# EAGLE board MP3 Breakout-Panel (EAGLE 9.0.1), part 1 of 2
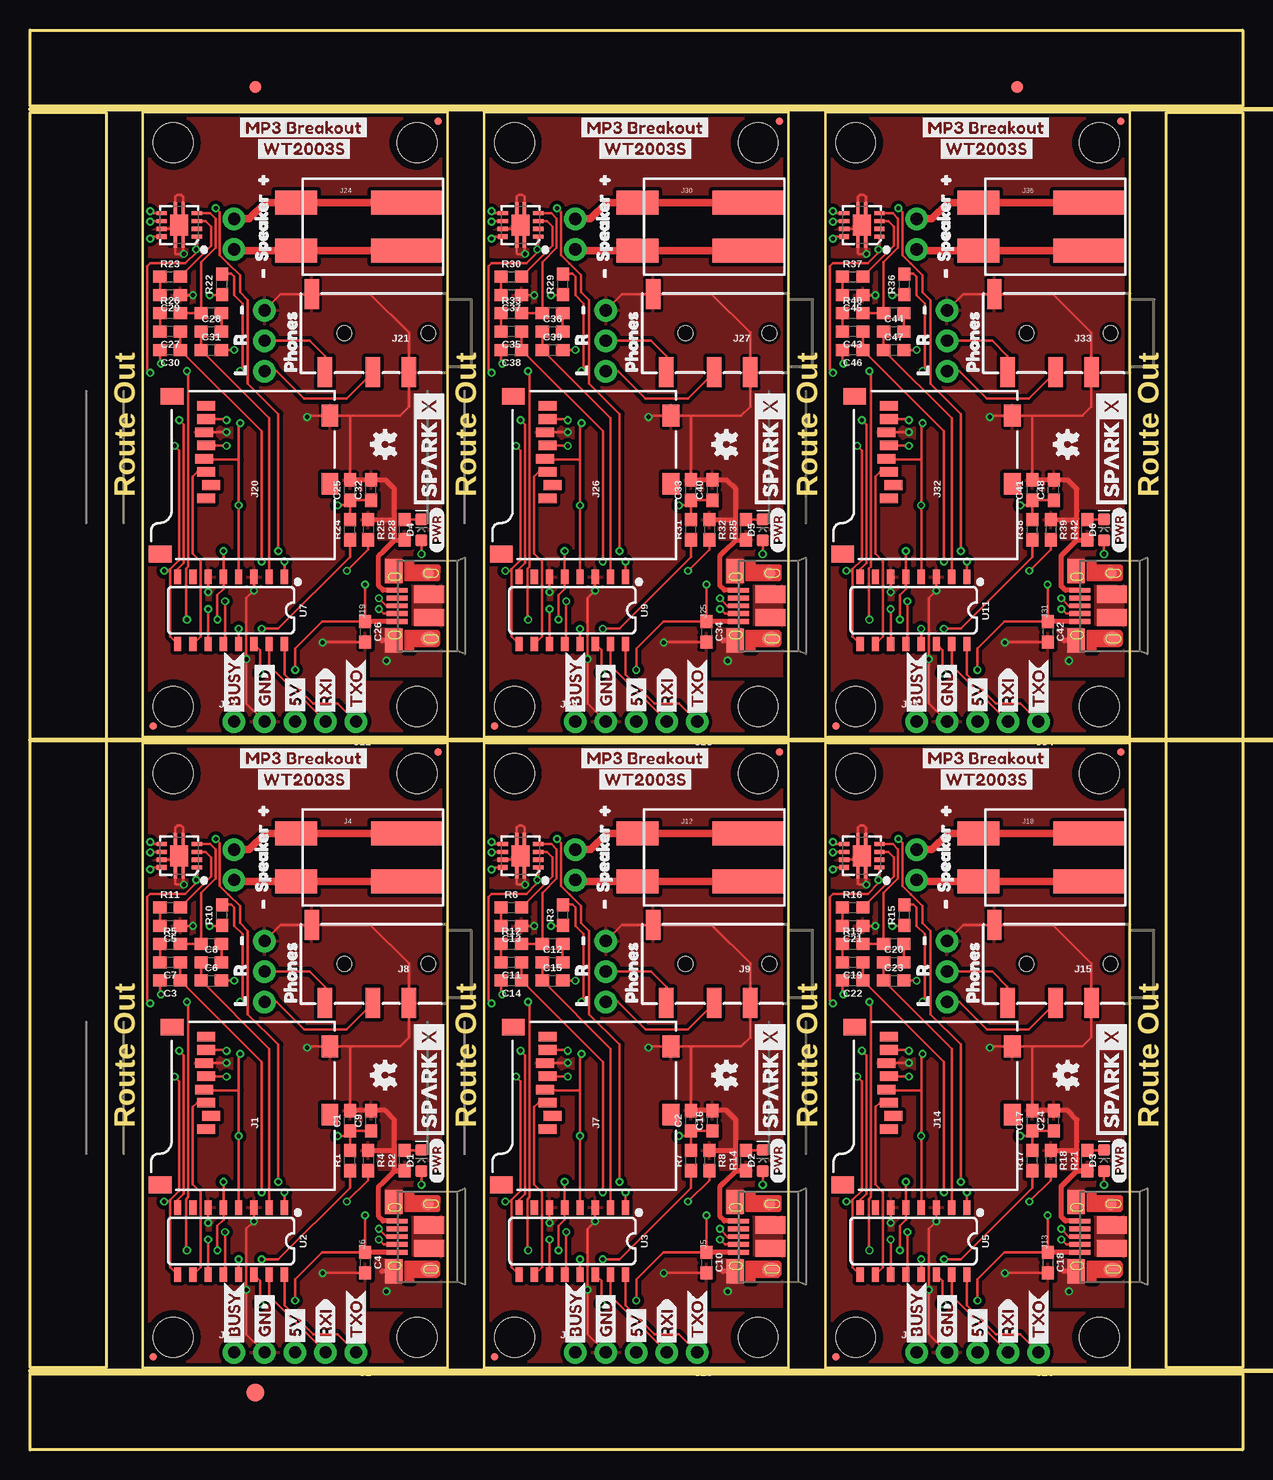
[diagram p0: board, top side]
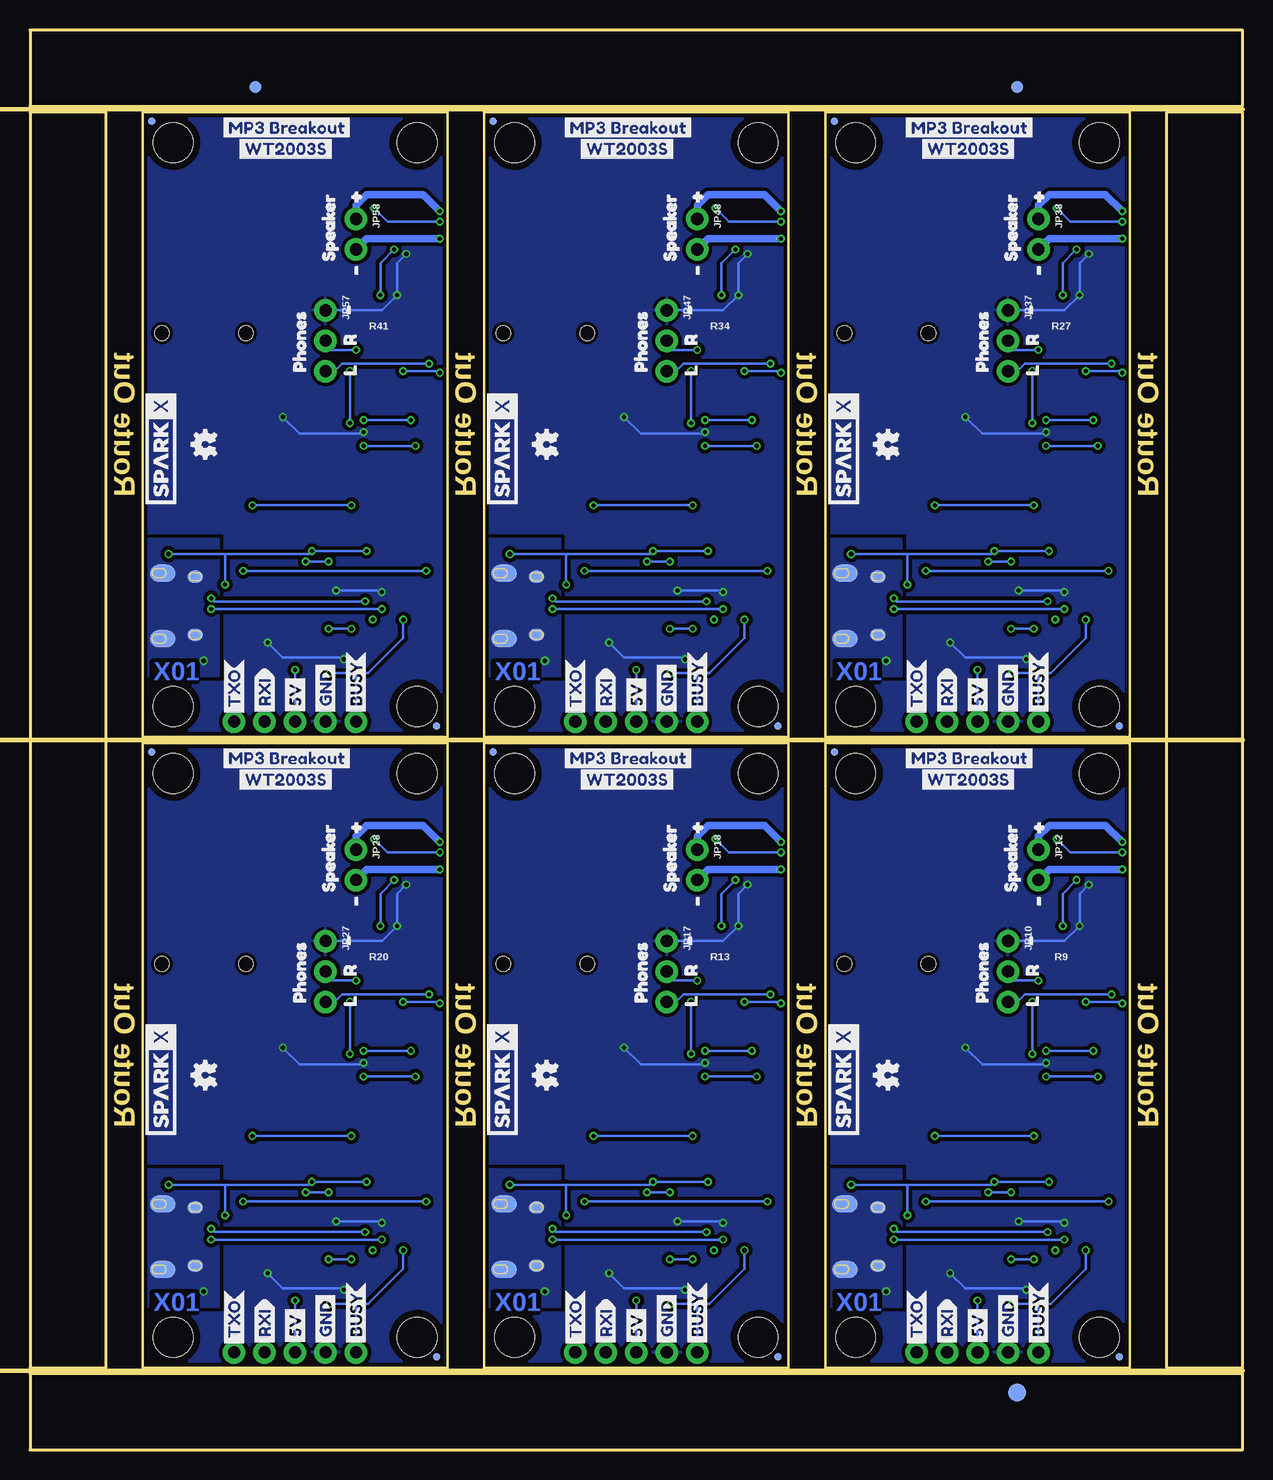
[diagram p1: board, bottom side, seen from below]

Size 101.09 x 118.36 mm. Coordinates in mm from the lower left corner, seen from the top.
Outline: 34.8,6.86 34.8,58.93 9.4,58.93 9.4,6.86 34.8,6.86
Outline: 63.25,6.86 63.25,58.93 37.85,58.93 37.85,6.86 63.25,6.86
Outline: 91.69,6.86 91.69,58.93 66.29,58.93 66.29,6.86 91.69,6.86
Outline: 34.8,59.44 34.8,111.51 9.4,111.51 9.4,59.44 34.8,59.44
Outline: 63.25,59.44 63.25,111.51 37.85,111.51 37.85,59.44 63.25,59.44
Outline: 91.69,59.44 91.69,111.51 66.29,111.51 66.29,59.44 91.69,59.44
Outline: 0,6.35 101.09,6.35 101.09,0 0,0 0,6.35
Outline: 94.74,111.51 101.09,111.51 101.09,6.86 94.74,6.86 94.74,111.51
Outline: 0,118.36 101.09,118.36 101.09,112.01 0,112.01 0,118.36
Outline: 0,111.51 6.35,111.51 6.35,6.86 0,6.86 0,111.51
Copper layers (1*16): Top 0.035mm / dielectric 1.5mm / Bottom 0.035mm
Design rules "SparkFun-2-layer-PCBWay-LIMIT": minimum track width 6mil, minimum drill 0.3mm, track to track 6mil, track to pad 6mil, pad to pad 6mil, via to via 6mil, smd to smd 6mil, copper to edge 6mil, drill to drill 6mil, minimum pad ring 6mil, minimum via ring 6mil, stop-mask expansion 4mil, vias tented up to drill 25mil, thermal gap 10mil
Milling: 3 lines

## Footprints (pad centres in the part's own frame; a part is rotated, then mirrored left to right if it is on the bottom)
0603 = smd 1.1 x 1: 1 -0.85,0; 2 0.85,0
LED-0603 = smd 1 x 1: A -0.877,0; C 0.877,0
FIDUCIAL-1X2 = smd 1 x 1: 1 0,0
FIDUCIAL-1.5X3 = smd 1.5 x 1.5: 1 0,0
MICRO-SD-SOCKET = smd 1.8 x 1.4: CD1 -2.05,0.4; CD2 -7.75,0.4 | smd 0.8 x 1.5: CS -7.84,10.3; DI -6.74,10.7; DO -2.34,10.7; GND -3.44,10.9; RSV1 -8.94,10.7; RSV2 -1.24,10.7; SCLK -4.54,10.7; VCC -5.64,10.9 | smd 1.4 x 1.9: GND1 -13.6,14.55; GND3 -0.45,13.55
1X04_NO_SILK = drill 1.016 pad 1.88: 1 0,0; 2 2.54,0; 3 5.08,0; 4 7.62,0
1X01_NO_SILK = drill 1.016 pad 1.88: 1 0,0
1X02_POKEHOME = smd 3.5 x 2: P1 5.25,2; P2 5.25,-2 | smd 6 x 2: P3 -4,2; P4 -4,-2
USB-MICROB-PTH-MILL = smd 0.4 x 1.75: D+ 0,0; D- -0.65,0; GND 1.3,0; ID 0.65,0; VBUS -1.3,0 | smd 2 x 1.46: SHIELD -2.9,0.275; SHIELD2 2.9,0.275 | smd 1.425 x 2.5: SHIELD3 -0.963,-2.675; SHIELD4 0.963,-2.675 | smd 1.4 x 2.1 bottom: SHIELD5 -2.731,-2.531; SHIELD7 2.729,-2.531 | smd 1 x 1: SHIELD6 2.7,-2.575 | smd 1.1 x 1.5: SHIELD8 -2.731,-2.731 | smd 1 x 1.3 bottom: SHIELD9 -2.43,0.195; SHIELD10 2.43,0.195
AUDIO_JACK_3.5MM_TRRS_SMD_RA = smd 1.2 x 2.5: EARTH 11.3,-3.25; RING1 6.2,3.25; RING2 3.2,3.25; TIP 10.2,3.25 | hole 1.2: 1.6,0; 8.6,0
MICRO-FIDUCIAL = smd 0.635 x 0.635: 1 0,0
STAND-OFF = hole 3.302: 0,0
1X03_NO_SILK = drill 1.016 pad 1.88: 1 0,0; 2 2.54,0; 3 5.08,0
1X02_NO_SILK = drill 1.016 pad 1.88: 1 0,0; 2 2.54,0
QFN-8_PAD = smd 0.35 x 0.85: 1 -0.975,-1.475; 2 -0.325,-1.475; 3 0.325,-1.475; 4 0.975,-1.475; 5 0.975,1.475; 6 0.325,1.475; 7 -0.325,1.475; 8 -0.975,1.475 | smd 1.75 x 1.5: 9 0,0 | smd 1.025 x 0.28: 10 -1.387,-0.325; 11 1.387,-0.325; 12 1.387,0.325; 13 -1.387,0.325
SO16 = smd 0.6 x 1.2: 1 -4.445,-2.8; 2 -3.175,-2.8; 3 -1.905,-2.8; 4 -0.635,-2.8; 5 0.635,-2.8; 6 1.905,-2.8; 7 3.175,-2.8; 8 4.445,-2.8; 9 4.445,2.8; 10 3.175,2.8; 11 1.905,2.8; 12 0.635,2.8; 13 -0.635,2.8; 14 -1.905,2.8; 15 -3.175,2.8; 16 -4.445,2.8

## Placement (x,y rotation side)
C1  10uF  [0603]  26.67,27.43 90 top
C2  10uF  [0603]  55.12,27.43 90 top
C3  0.22uF  [0603]  11.68,39.12 180 top
C4  1.0uF  [0603]  27.94,15.62 270 top
C5  1.0uF  [0603]  11.68,43.69 180 top
C6  0.22uF  [0603]  15.11,39.12 0 top
C7  0.1uF  [0603]  11.68,40.64 180 top
C8  0.1uF  [0603]  15.11,40.64 0 top
C9  1.0uF  [0603]  28.45,27.43 90 top
C10  1.0uF  [0603]  56.39,15.62 270 top
C11  0.1uF  [0603]  40.13,40.64 180 top
C12  0.1uF  [0603]  43.56,40.64 0 top
C13  1.0uF  [0603]  40.13,43.69 180 top
C14  0.22uF  [0603]  40.13,39.12 180 top
C15  0.22uF  [0603]  43.56,39.12 0 top
C16  1.0uF  [0603]  56.9,27.43 90 top
C17  10uF  [0603]  83.57,27.43 90 top
C18  1.0uF  [0603]  84.84,15.62 270 top
C19  0.1uF  [0603]  68.58,40.64 180 top
C20  0.1uF  [0603]  72.01,40.64 0 top
C21  1.0uF  [0603]  68.58,43.69 180 top
C22  0.22uF  [0603]  68.58,39.12 180 top
C23  0.22uF  [0603]  72.01,39.12 0 top
C24  1.0uF  [0603]  85.34,27.43 90 top
C25  10uF  [0603]  26.67,80.01 90 top
C26  1.0uF  [0603]  27.94,68.2 270 top
C27  0.1uF  [0603]  11.68,93.22 180 top
C28  0.1uF  [0603]  15.11,93.22 0 top
C29  1.0uF  [0603]  11.68,96.27 180 top
C30  0.22uF  [0603]  11.68,91.69 180 top
C31  0.22uF  [0603]  15.11,91.69 0 top
C32  1.0uF  [0603]  28.45,80.01 90 top
C33  10uF  [0603]  55.12,80.01 90 top
C34  1.0uF  [0603]  56.39,68.2 270 top
C35  0.1uF  [0603]  40.13,93.22 180 top
C36  0.1uF  [0603]  43.56,93.22 0 top
C37  1.0uF  [0603]  40.13,96.27 180 top
C38  0.22uF  [0603]  40.13,91.69 180 top
C39  0.22uF  [0603]  43.56,91.69 0 top
C40  1.0uF  [0603]  56.9,80.01 90 top
C41  10uF  [0603]  83.57,80.01 90 top
C42  1.0uF  [0603]  84.84,68.2 270 top
C43  0.1uF  [0603]  68.58,93.22 180 top
C44  0.1uF  [0603]  72.01,93.22 0 top
C45  1.0uF  [0603]  68.58,96.27 180 top
C46  0.22uF  [0603]  68.58,91.69 180 top
C47  0.22uF  [0603]  72.01,91.69 0 top
C48  1.0uF  [0603]  85.34,80.01 90 top
D1  RED  [LED-0603]  32.64,24.13 90 top
D2  RED  [LED-0603]  61.09,24.13 90 top
D3  RED  [LED-0603]  89.53,24.13 90 top
D4  RED  [LED-0603]  32.64,76.71 90 top
D5  RED  [LED-0603]  61.09,76.71 90 top
D6  RED  [LED-0603]  89.53,76.71 90 top
E$1  [FIDUCIAL-1X2]  18.8,113.6 0 top
E$2  [FIDUCIAL-1X2]  18.8,113.6 0 bottom
E$3  [FIDUCIAL-1X2]  82.3,113.6 0 top
E$4  [FIDUCIAL-1X2]  82.3,113.6 0 bottom
E$5  [FIDUCIAL-1.5X3]  18.8,4.76 0 top
E$6  [FIDUCIAL-1.5X3]  18.8,4.76 0 bottom
J1  MICRO-SD  [MICRO-SD-SOCKET]  25.4,35.69 90 top
J2  Header  [1X04_NO_SILK]  27.18,8.13 180 top
J3  [1X01_NO_SILK]  17.02,8.13 0 top
J4  Poke-Home  [1X02_POKEHOME]  27.43,49.4 180 top
J5  [USB-MICROB-PTH-MILL]  59.05,17.78 90 top
J6  [USB-MICROB-PTH-MILL]  30.61,17.78 90 top
J7  MICRO-SD  [MICRO-SD-SOCKET]  53.85,35.69 90 top
J8  3.5mm Audio  [AUDIO_JACK_3.5MM_TRRS_SMD_RA]  34.8,40.51 180 top
J9  3.5mm Audio  [AUDIO_JACK_3.5MM_TRRS_SMD_RA]  63.25,40.51 180 top
J10  Header  [1X04_NO_SILK]  55.63,8.13 180 top
J11  [1X01_NO_SILK]  45.47,8.13 0 top
J12  Poke-Home  [1X02_POKEHOME]  55.88,49.4 180 top
J13  [USB-MICROB-PTH-MILL]  87.5,17.78 90 top
J14  MICRO-SD  [MICRO-SD-SOCKET]  82.3,35.69 90 top
J15  3.5mm Audio  [AUDIO_JACK_3.5MM_TRRS_SMD_RA]  91.69,40.51 180 top
J16  Header  [1X04_NO_SILK]  84.07,8.13 180 top
J17  [1X01_NO_SILK]  73.91,8.13 0 top
J18  Poke-Home  [1X02_POKEHOME]  84.33,49.4 180 top
J19  [USB-MICROB-PTH-MILL]  30.61,70.36 90 top
J20  MICRO-SD  [MICRO-SD-SOCKET]  25.4,88.27 90 top
J21  3.5mm Audio  [AUDIO_JACK_3.5MM_TRRS_SMD_RA]  34.8,93.09 180 top
J22  Header  [1X04_NO_SILK]  27.18,60.71 180 top
J23  [1X01_NO_SILK]  17.02,60.71 0 top
J24  Poke-Home  [1X02_POKEHOME]  27.43,101.98 180 top
J25  [USB-MICROB-PTH-MILL]  59.05,70.36 90 top
J26  MICRO-SD  [MICRO-SD-SOCKET]  53.85,88.27 90 top
J27  3.5mm Audio  [AUDIO_JACK_3.5MM_TRRS_SMD_RA]  63.25,93.09 180 top
J28  Header  [1X04_NO_SILK]  55.63,60.71 180 top
J29  [1X01_NO_SILK]  45.47,60.71 0 top
J30  Poke-Home  [1X02_POKEHOME]  55.88,101.98 180 top
J31  [USB-MICROB-PTH-MILL]  87.5,70.36 90 top
J32  MICRO-SD  [MICRO-SD-SOCKET]  82.3,88.27 90 top
J33  3.5mm Audio  [AUDIO_JACK_3.5MM_TRRS_SMD_RA]  91.69,93.09 180 top
J34  Header  [1X04_NO_SILK]  84.07,60.71 180 top
J35  [1X01_NO_SILK]  73.91,60.71 0 top
J36  Poke-Home  [1X02_POKEHOME]  84.33,101.98 180 top
JP1  FIDUCIALUFIDUCIAL  [MICRO-FIDUCIAL]  34.04,58.17 0 top
JP2  FIDUCIALUFIDUCIAL  [MICRO-FIDUCIAL]  10.29,7.75 0 bottom
JP3  STAND-OFF  [STAND-OFF]  32.26,56.39 0 top
JP4  STAND-OFF  [STAND-OFF]  11.94,56.39 0 top
JP5  FIDUCIALUFIDUCIAL  [MICRO-FIDUCIAL]  10.29,7.75 0 top
JP6  FIDUCIALUFIDUCIAL  [MICRO-FIDUCIAL]  34.04,58.17 0 bottom
JP7  STAND-OFF  [STAND-OFF]  60.71,56.39 0 top
JP8  STAND-OFF  [STAND-OFF]  40.39,56.39 0 top
JP9  FIDUCIALUFIDUCIAL  [MICRO-FIDUCIAL]  38.73,7.75 0 bottom
JP10  PTH  [1X03_NO_SILK]  19.56,42.42 270 bottom
JP11  STAND-OFF  [STAND-OFF]  32.26,9.4 0 top
JP12  PTH  [1X02_NO_SILK]  17.02,50.04 270 bottom
JP13  STAND-OFF  [STAND-OFF]  11.94,9.4 0 top
JP14  FIDUCIALUFIDUCIAL  [MICRO-FIDUCIAL]  62.48,58.17 0 bottom
JP15  FIDUCIALUFIDUCIAL  [MICRO-FIDUCIAL]  62.48,58.17 0 top
JP16  FIDUCIALUFIDUCIAL  [MICRO-FIDUCIAL]  38.73,7.75 0 top
JP17  PTH  [1X03_NO_SILK]  48.01,42.42 270 bottom
JP18  PTH  [1X02_NO_SILK]  45.47,50.04 270 bottom
JP19  STAND-OFF  [STAND-OFF]  60.71,9.4 0 top
JP20  STAND-OFF  [STAND-OFF]  40.39,9.4 0 top
JP21  STAND-OFF  [STAND-OFF]  89.15,56.39 0 top
JP22  STAND-OFF  [STAND-OFF]  68.83,56.39 0 top
JP23  FIDUCIALUFIDUCIAL  [MICRO-FIDUCIAL]  67.18,7.75 0 bottom
JP24  FIDUCIALUFIDUCIAL  [MICRO-FIDUCIAL]  90.93,58.17 0 bottom
JP25  FIDUCIALUFIDUCIAL  [MICRO-FIDUCIAL]  90.93,58.17 0 top
JP26  FIDUCIALUFIDUCIAL  [MICRO-FIDUCIAL]  67.18,7.75 0 top
JP27  PTH  [1X03_NO_SILK]  76.45,42.42 270 bottom
JP28  PTH  [1X02_NO_SILK]  73.91,50.04 270 bottom
JP29  STAND-OFF  [STAND-OFF]  89.15,9.4 0 top
JP30  STAND-OFF  [STAND-OFF]  68.83,9.4 0 top
JP31  STAND-OFF  [STAND-OFF]  32.26,108.97 0 top
JP32  STAND-OFF  [STAND-OFF]  11.94,108.97 0 top
JP33  FIDUCIALUFIDUCIAL  [MICRO-FIDUCIAL]  10.29,60.32 0 bottom
JP34  FIDUCIALUFIDUCIAL  [MICRO-FIDUCIAL]  34.04,110.74 0 bottom
JP35  FIDUCIALUFIDUCIAL  [MICRO-FIDUCIAL]  34.04,110.74 0 top
JP36  FIDUCIALUFIDUCIAL  [MICRO-FIDUCIAL]  10.29,60.32 0 top
JP37  PTH  [1X03_NO_SILK]  19.56,95 270 bottom
JP38  PTH  [1X02_NO_SILK]  17.02,102.62 270 bottom
JP39  STAND-OFF  [STAND-OFF]  32.26,61.98 0 top
JP40  STAND-OFF  [STAND-OFF]  11.94,61.98 0 top
JP41  STAND-OFF  [STAND-OFF]  60.71,108.97 0 top
JP42  STAND-OFF  [STAND-OFF]  40.39,108.97 0 top
JP43  FIDUCIALUFIDUCIAL  [MICRO-FIDUCIAL]  38.73,60.32 0 bottom
JP44  FIDUCIALUFIDUCIAL  [MICRO-FIDUCIAL]  62.48,110.74 0 bottom
JP45  FIDUCIALUFIDUCIAL  [MICRO-FIDUCIAL]  62.48,110.74 0 top
JP46  FIDUCIALUFIDUCIAL  [MICRO-FIDUCIAL]  38.73,60.32 0 top
JP47  PTH  [1X03_NO_SILK]  48.01,95 270 bottom
JP48  PTH  [1X02_NO_SILK]  45.47,102.62 270 bottom
JP49  STAND-OFF  [STAND-OFF]  60.71,61.98 0 top
JP50  STAND-OFF  [STAND-OFF]  40.39,61.98 0 top
JP51  STAND-OFF  [STAND-OFF]  89.15,108.97 0 top
JP52  STAND-OFF  [STAND-OFF]  68.83,108.97 0 top
JP53  FIDUCIALUFIDUCIAL  [MICRO-FIDUCIAL]  67.18,60.32 0 bottom
JP54  FIDUCIALUFIDUCIAL  [MICRO-FIDUCIAL]  90.93,110.74 0 bottom
JP55  FIDUCIALUFIDUCIAL  [MICRO-FIDUCIAL]  90.93,110.74 0 top
JP56  FIDUCIALUFIDUCIAL  [MICRO-FIDUCIAL]  67.18,60.32 0 top
JP57  PTH  [1X03_NO_SILK]  76.45,95 270 bottom
JP58  PTH  [1X02_NO_SILK]  73.91,102.62 270 bottom
JP59  STAND-OFF  [STAND-OFF]  89.15,61.98 0 top
JP60  STAND-OFF  [STAND-OFF]  68.83,61.98 0 top
LOGO1  OSHW-LOGOMINI  [OSHW-LOGO-MINI]  29.59,31.24 90 top
LOGO2  OSHW-LOGOMINI  [OSHW-LOGO-MINI@1]  29.59,31.24 90 bottom
LOGO3  OSHW-LOGOMINI  [OSHW-LOGO-MINI]  58.04,31.24 90 top
LOGO4  OSHW-LOGOMINI  [OSHW-LOGO-MINI@1]  58.04,31.24 90 bottom
LOGO5  OSHW-LOGOMINI  [OSHW-LOGO-MINI]  86.49,31.24 90 top
LOGO6  OSHW-LOGOMINI  [OSHW-LOGO-MINI@1]  86.49,31.24 90 bottom
LOGO7  OSHW-LOGOMINI  [OSHW-LOGO-MINI]  29.59,83.82 90 top
LOGO8  OSHW-LOGOMINI  [OSHW-LOGO-MINI@1]  29.59,83.82 90 bottom
LOGO9  OSHW-LOGOMINI  [OSHW-LOGO-MINI]  58.04,83.82 90 top
LOGO10  OSHW-LOGOMINI  [OSHW-LOGO-MINI@1]  58.04,83.82 90 bottom
LOGO11  OSHW-LOGOMINI  [OSHW-LOGO-MINI]  86.49,83.82 90 top
LOGO12  OSHW-LOGOMINI  [OSHW-LOGO-MINI@1]  86.49,83.82 90 bottom
R1  10k  [0603]  26.67,24.13 90 top
R2  1k  [0603]  31.24,24.13 90 top
R3  10k  [0603]  44.45,44.58 90 top
R4  2.2k  [0603]  28.19,24.13 270 top
R5  10k  [0603]  11.68,42.16 0 top
R6  100k  [0603]  40.13,45.21 0 top
R7  10k  [0603]  55.12,24.13 90 top
R8  2.2k  [0603]  56.64,24.13 270 top
R9  10k  [0603]  15.11,42.16 180 top
R10  10k  [0603]  16,44.58 90 top
R11  100k  [0603]  11.68,45.21 0 top
R12  10k  [0603]  40.13,42.16 0 top
R13  10k  [0603]  43.56,42.16 180 top
R14  1k  [0603]  59.69,24.13 90 top
R15  10k  [0603]  72.9,44.58 90 top
R16  100k  [0603]  68.58,45.21 0 top
R17  10k  [0603]  83.57,24.13 90 top
R18  2.2k  [0603]  85.09,24.13 270 top
R19  10k  [0603]  68.58,42.16 0 top
R20  10k  [0603]  72.01,42.16 180 top
R21  1k  [0603]  88.14,24.13 90 top
R22  10k  [0603]  16,97.16 90 top
R23  100k  [0603]  11.68,97.79 0 top
R24  10k  [0603]  26.67,76.71 90 top
R25  2.2k  [0603]  28.19,76.71 270 top
R26  10k  [0603]  11.68,94.74 0 top
R27  10k  [0603]  15.11,94.74 180 top
R28  1k  [0603]  31.24,76.71 90 top
R29  10k  [0603]  44.45,97.16 90 top
R30  100k  [0603]  40.13,97.79 0 top
R31  10k  [0603]  55.12,76.71 90 top
R32  2.2k  [0603]  56.64,76.71 270 top
R33  10k  [0603]  40.13,94.74 0 top
R34  10k  [0603]  43.56,94.74 180 top
R35  1k  [0603]  59.69,76.71 90 top
R36  10k  [0603]  72.9,97.16 90 top
R37  100k  [0603]  68.58,97.79 0 top
R38  10k  [0603]  83.57,76.71 90 top
R39  2.2k  [0603]  85.09,76.71 270 top
R40  10k  [0603]  68.58,94.74 0 top
R41  10k  [0603]  72.01,94.74 180 top
R42  1k  [0603]  88.14,76.71 90 top
U1  TPA2005D1  [QFN-8_PAD]  12.45,49.53 90 top
U2  WT2003S  [SO16]  16.76,17.4 180 top
U3  WT2003S  [SO16]  45.21,17.4 180 top
U4  TPA2005D1  [QFN-8_PAD]  40.89,49.53 90 top
U5  WT2003S  [SO16]  73.66,17.4 180 top
U6  TPA2005D1  [QFN-8_PAD]  69.34,49.53 90 top
U7  WT2003S  [SO16]  16.76,69.98 180 top
U8  TPA2005D1  [QFN-8_PAD]  12.45,102.11 90 top
U9  WT2003S  [SO16]  45.21,69.98 180 top
U10  TPA2005D1  [QFN-8_PAD]  40.89,102.11 90 top
U11  WT2003S  [SO16]  73.66,69.98 180 top
U12  TPA2005D1  [QFN-8_PAD]  69.34,102.11 90 top
U$1  [GND1]  19.56,8.51 90 bottom
U$2  SPARKX-LOGO4  [SPARKX-MEDIUM]  33.27,30.86 90 top
U$3  [L12]  17.53,36.07 90 bottom
U$4  [R11]  17.53,38.61 90 bottom
U$5  SPARKX-LOGO4  [SPARKX-MEDIUM]  61.72,30.86 90 top
U$6  [TXO0]  27.18,8.38 90 top
U$7  [RXI0]  24.64,8.51 90 top
U$8  [RXI0]  24.64,8.51 90 bottom
U$9  [TXO0]  27.18,8.38 90 bottom
U$10  [#6]  17.4,40.89 90 top
U$11  SPARKX-LOGO4  [SPARKX-MEDIUM]  33.27,30.86 90 bottom
U$12  [MP3_BREAKOUT0]  17.02,57.66 0 top
U$13  [BUSY0]  17.02,8.51 90 top
U$14  [BUSY0]  17.02,8.51 90 bottom
U$15  [#6]  17.91,40.89 90 bottom
U$16  [PHONES0]  21.72,36.2 90 bottom
U$17  [PWR-()-03]  33.91,22.23 90 top
U$18  [SPEAKER1]  19.3,45.59 90 bottom
U$19  [#5]  17.14,50.29 90 bottom
U$20  [SPEAKER1]  19.3,45.59 90 top
U$21  [#6]  17.27,44.2 90 bottom
U$22  [GND1]  19.56,8.51 90 top
U$23  [RXI0]  24.64,8.51 90 top
U$24  [MP3_BREAKOUT0]  28.57,57.66 0 bottom
U$25  [#6]  19.18,43.94 90 top
U$26  [WT2003S0]  18.54,55.88 0 top
U$27  [WT2003S0]  27.18,55.88 0 bottom
U$28  [#5]  19.3,51.69 90 top
U$29  [5V0]  22.1,8.51 90 top
U$30  [5V0]  22.1,8.51 90 bottom
U$31  [GND1]  48.01,8.51 90 top
U$32  [PWR-()-03]  62.36,22.23 90 top
U$33  [#6]  45.85,40.89 90 top
U$34  [SPEAKER1]  47.75,45.59 90 top
U$35  [#6]  47.62,43.94 90 top
U$36  [#5]  47.75,51.69 90 top
U$37  [R11]  45.97,38.61 90 top
U$38  [L12]  45.97,36.07 90 top
U$39  [R11]  17.53,38.61 90 top
U$40  [PHONES0]  21.72,36.2 90 top
U$41  [L12]  17.53,36.07 90 top
U$42  [PHONES0]  50.17,36.2 90 top
U$43  [TXO0]  55.63,8.38 90 top
U$44  [RXI0]  53.09,8.51 90 top
U$45  [GND1]  48.01,8.51 90 bottom
U$46  [RXI0]  53.09,8.51 90 top
U$47  [RXI0]  53.09,8.51 90 bottom
U$48  [TXO0]  55.63,8.38 90 bottom
U$49  SPARKX-LOGO4  [SPARKX-MEDIUM]  61.72,30.86 90 bottom
U$50  [BUSY0]  45.47,8.51 90 top
U$51  [BUSY0]  45.47,8.51 90 bottom
U$52  [L12]  45.97,36.07 90 bottom
U$53  [R11]  45.97,38.61 90 bottom
U$54  [#6]  46.36,40.89 90 bottom
U$55  [PHONES0]  50.17,36.2 90 bottom
U$56  [SPEAKER1]  47.75,45.59 90 bottom
U$57  [#5]  45.59,50.29 90 bottom
U$58  [#6]  45.72,44.2 90 bottom
U$59  [MP3_BREAKOUT0]  45.47,57.66 0 top
U$60  [MP3_BREAKOUT0]  57.02,57.66 0 bottom
U$61  [WT2003S0]  46.99,55.88 0 top
U$62  [WT2003S0]  55.63,55.88 0 bottom
U$63  [5V0]  50.55,8.51 90 top
U$64  [5V0]  50.55,8.51 90 bottom
U$65  SPARKX-LOGO4  [SPARKX-MEDIUM]  90.17,30.86 90 top
U$66  [GND1]  76.45,8.51 90 top
U$67  [PWR-()-03]  90.8,22.23 90 top
U$68  [#6]  74.3,40.89 90 top
U$69  [SPEAKER1]  76.2,45.59 90 top
U$70  [#6]  76.07,43.94 90 top
U$71  [#5]  76.2,51.69 90 top
U$72  [R11]  74.42,38.61 90 top
U$73  [L12]  74.42,36.07 90 top
U$74  [PHONES0]  78.61,36.2 90 top
U$75  [TXO0]  84.07,8.38 90 top
U$76  [RXI0]  81.53,8.51 90 top
U$77  [GND1]  76.45,8.51 90 bottom
U$78  [RXI0]  81.53,8.51 90 top
U$79  [RXI0]  81.53,8.51 90 bottom
U$80  [TXO0]  84.07,8.38 90 bottom
U$81  SPARKX-LOGO4  [SPARKX-MEDIUM]  90.17,30.86 90 bottom
U$82  [BUSY0]  73.91,8.51 90 top
U$83  [BUSY0]  73.91,8.51 90 bottom
U$84  [L12]  74.42,36.07 90 bottom
U$85  [R11]  74.42,38.61 90 bottom
U$86  [#6]  74.8,40.89 90 bottom
U$87  [PHONES0]  78.61,36.2 90 bottom
U$88  [SPEAKER1]  76.2,45.59 90 bottom
U$89  [#5]  74.04,50.29 90 bottom
U$90  [#6]  74.17,44.2 90 bottom
U$91  [MP3_BREAKOUT0]  73.91,57.66 0 top
U$92  [MP3_BREAKOUT0]  85.47,57.66 0 bottom
U$93  [WT2003S0]  75.44,55.88 0 top
U$94  [WT2003S0]  84.07,55.88 0 bottom
U$95  [5V0]  78.99,8.51 90 top
U$96  [5V0]  78.99,8.51 90 bottom
U$97  SPARKX-LOGO4  [SPARKX-MEDIUM]  33.27,83.44 90 top
U$98  [GND1]  19.56,61.09 90 top
U$99  [PWR-()-03]  33.91,74.8 90 top
U$100  [#6]  17.4,93.47 90 top
U$101  [SPEAKER1]  19.3,98.17 90 top
U$102  [#6]  19.18,96.52 90 top
U$103  [#5]  19.3,104.27 90 top
U$104  [R11]  17.53,91.19 90 top
U$105  [L12]  17.53,88.65 90 top
U$106  [PHONES0]  21.72,88.77 90 top
U$107  [TXO0]  27.18,60.96 90 top
U$108  [RXI0]  24.64,61.09 90 top
U$109  [GND1]  19.56,61.09 90 bottom
U$110  [RXI0]  24.64,61.09 90 top
U$111  [RXI0]  24.64,61.09 90 bottom
U$112  [TXO0]  27.18,60.96 90 bottom
U$113  SPARKX-LOGO4  [SPARKX-MEDIUM]  33.27,83.44 90 bottom
U$114  [BUSY0]  17.02,61.09 90 top
U$115  [BUSY0]  17.02,61.09 90 bottom
U$116  [L12]  17.53,88.65 90 bottom
U$117  [R11]  17.53,91.19 90 bottom
U$118  [#6]  17.91,93.47 90 bottom
U$119  [PHONES0]  21.72,88.77 90 bottom
U$120  [SPEAKER1]  19.3,98.17 90 bottom
U$121  [#5]  17.14,102.87 90 bottom
U$122  [#6]  17.27,96.77 90 bottom
U$123  [MP3_BREAKOUT0]  17.02,110.24 0 top
U$124  [MP3_BREAKOUT0]  28.57,110.24 0 bottom
U$125  [WT2003S0]  18.54,108.46 0 top
U$126  [WT2003S0]  27.18,108.46 0 bottom
U$127  [5V0]  22.1,61.09 90 top
U$128  [5V0]  22.1,61.09 90 bottom
U$129  SPARKX-LOGO4  [SPARKX-MEDIUM]  61.72,83.44 90 top
U$130  [GND1]  48.01,61.09 90 top
U$131  [PWR-()-03]  62.36,74.8 90 top
U$132  [#6]  45.85,93.47 90 top
U$133  [SPEAKER1]  47.75,98.17 90 top
U$134  [#6]  47.62,96.52 90 top
U$135  [#5]  47.75,104.27 90 top
U$136  [R11]  45.97,91.19 90 top
U$137  [L12]  45.97,88.65 90 top
U$138  [PHONES0]  50.17,88.77 90 top
U$139  [TXO0]  55.63,60.96 90 top
U$140  [RXI0]  53.09,61.09 90 top
U$141  [GND1]  48.01,61.09 90 bottom
U$142  [RXI0]  53.09,61.09 90 top
U$143  [RXI0]  53.09,61.09 90 bottom
U$144  [TXO0]  55.63,60.96 90 bottom
U$145  SPARKX-LOGO4  [SPARKX-MEDIUM]  61.72,83.44 90 bottom
U$146  [BUSY0]  45.47,61.09 90 top
U$147  [BUSY0]  45.47,61.09 90 bottom
U$148  [L12]  45.97,88.65 90 bottom
U$149  [R11]  45.97,91.19 90 bottom
U$150  [#6]  46.36,93.47 90 bottom
U$151  [PHONES0]  50.17,88.77 90 bottom
U$152  [SPEAKER1]  47.75,98.17 90 bottom
U$153  [#5]  45.59,102.87 90 bottom
U$154  [#6]  45.72,96.77 90 bottom
U$155  [MP3_BREAKOUT0]  45.47,110.24 0 top
U$156  [MP3_BREAKOUT0]  57.02,110.24 0 bottom
U$157  [WT2003S0]  46.99,108.46 0 top
U$158  [WT2003S0]  55.63,108.46 0 bottom
U$159  [5V0]  50.55,61.09 90 top
U$160  [5V0]  50.55,61.09 90 bottom
U$161  SPARKX-LOGO4  [SPARKX-MEDIUM]  90.17,83.44 90 top
U$162  [GND1]  76.45,61.09 90 top
U$163  [PWR-()-03]  90.8,74.8 90 top
U$164  [#6]  74.3,93.47 90 top
U$165  [SPEAKER1]  76.2,98.17 90 top
U$166  [#6]  76.07,96.52 90 top
U$167  [#5]  76.2,104.27 90 top
U$168  [R11]  74.42,91.19 90 top
U$169  [L12]  74.42,88.65 90 top
U$170  [PHONES0]  78.61,88.77 90 top
U$171  [TXO0]  84.07,60.96 90 top
U$172  [RXI0]  81.53,61.09 90 top
U$173  [GND1]  76.45,61.09 90 bottom
U$174  [RXI0]  81.53,61.09 90 top
U$175  [RXI0]  81.53,61.09 90 bottom
U$176  [TXO0]  84.07,60.96 90 bottom
U$177  SPARKX-LOGO4  [SPARKX-MEDIUM]  90.17,83.44 90 bottom
U$178  [BUSY0]  73.91,61.09 90 top
U$179  [BUSY0]  73.91,61.09 90 bottom
U$180  [L12]  74.42,88.65 90 bottom
U$181  [R11]  74.42,91.19 90 bottom
U$182  [#6]  74.8,93.47 90 bottom
U$183  [PHONES0]  78.61,88.77 90 bottom
U$184  [SPEAKER1]  76.2,98.17 90 bottom
U$185  [#5]  74.04,102.87 90 bottom
U$186  [#6]  74.17,96.77 90 bottom
U$187  [MP3_BREAKOUT0]  73.91,110.24 0 top
U$188  [MP3_BREAKOUT0]  85.47,110.24 0 bottom
U$189  [WT2003S0]  75.44,108.46 0 top
U$190  [WT2003S0]  84.07,108.46 0 bottom
U$191  [5V0]  78.99,61.09 90 top
U$192  [5V0]  78.99,61.09 90 bottom

## Library data of the parts
C1 C2 C17 C25 C33 C41 = SparkFun-Capacitors; PROD_ID: CAP-11015
C3 C6 C14 C15 C22 C23 C30 C31 C38 C39 C46 C47 = SparkFun-Capacitors; PROD_ID: CAP-07822
C4 C5 C9 C10 C13 C16 C18 C21 C24 C26 C29 C32 C34 C37 C40 C42 C45 C48 = SparkFun-Capacitors; PROD_ID: CAP-00868
C7 C8 C11 C12 C19 C20 C27 C28 C35 C36 C43 C44 = SparkFun-Capacitors; PROD_ID: CAP-00810
D1-D6 = SparkFun-LED; PROD_ID: DIO-00819
E$1-E$4 LOGO1-LOGO12 = SparkFun-Aesthetics
E$5 E$6 = SparkFun-Retired
J1 J7 J14 J20 J26 J32 = SparkFun-Connectors; PROD_ID: CONN-07820
J2 J10 J16 J22 J28 J34 = SparkFun-Connectors; PROD_ID: CONN-09696
J3 J11 J17 J23 J29 J35 JP10 JP12 JP17 JP18 JP27 JP28 JP37 JP38 JP47 JP48 JP57 JP58 = SparkFun-Connectors
J4 J12 J18 J24 J30 J36 = SparkFun-Connectors; PROD_ID: CONN-13512
J5 J6 J13 J19 J25 J31 = SparkFun-Connectors; PROD_ID: CONN-13711
J8 J9 J15 J21 J27 J33 = SparkFun-Connectors; PROD_ID: CONN-10676; SF_ID: PRT-12639
JP1-JP9 JP11 JP13-JP16 JP19-JP26 JP29-JP36 JP39-JP46 JP49-JP56 JP59 JP60 = SparkFun
R1 R3 R5 R7 R9 R10 R12 R13 R15 R17 R19 R20 R22 R24 R26 R27 R29 R31 R33 R34 R36 R38 R40 R41 = SparkFun-Resistors; PROD_ID: RES-00824
R2 R14 R21 R28 R35 R42 = SparkFun-Resistors; PROD_ID: RES-07856
R4 R8 R18 R25 R32 R39 = SparkFun-Resistors; PROD_ID: RES-08272
R6 R11 R16 R23 R30 R37 = SparkFun-Resistors; PROD_ID: RES-07828; VALUE: 4.7k
U1 U4 U6 U8 U10 U12 = SparkFun-IC-Amplifiers; PROD_ID: IC-10975
U2 U3 U5 U7 U9 U11 = WT2003S
U$1 U$22 U$31 U$45 U$66 U$77 U$98 U$109 U$130 U$141 U$162 U$173 = Labels-0_04
U$2 U$5 U$11 U$49 U$65 U$81 U$97 U$113 U$129 U$145 U$161 U$177 = SparkX
U$3 U$4 U$10 U$15 U$19 U$21 U$25 U$28 U$33 U$35-U$39 U$41 U$52-U$54 U$57 U$58 U$68 U$70-U$73 U$84-U$86 U$89 U$90 U$100 U$102-U$105 U$116-U$118 U$121 U$122 U$132 U$134-U$137 U$148-U$150 U$153 U$154 U$164 U$166-U$169 U$180-U$182 U$185 U$186 = buzzard_labels (16)
U$6 U$9 U$12-U$14 U$24 U$26 U$27 U$29 U$30 U$43 U$48 U$50 U$51 U$59-U$64 U$75 U$80 U$82 U$83 U$91-U$96 U$107 U$112 U$114 U$115 U$123-U$128 U$139 U$144 U$146 U$147 U$155-U$160 U$171 U$176 U$178 U$179 U$187-U$192 = buzzard_labels
U$7 U$8 U$23 U$44 U$46 U$47 U$76 U$78 U$79 U$108 U$110 U$111 U$140 U$142 U$143 U$172 U$174 U$175 = buzzard_labels (1)
U$16 U$18 U$20 U$34 U$40 U$42 U$55 U$56 U$69 U$74 U$87 U$88 U$101 U$106 U$119 U$120 U$133 U$138 U$151 U$152 U$165 U$170 U$183 U$184 = buzzard_labels (17)
U$17 U$32 U$67 U$99 U$131 U$163 = Labels

## Nets
5V: C4.1 D1.A J2.3 J6.VBUS U1.6 U2.5
5V1: C10.1 D2.A J5.VBUS J10.3 U3.5 U4.6
5V2: C18.1 D3.A J13.VBUS J16.3 U5.5 U6.6
5V3: C26.1 D4.A J19.VBUS J22.3 U7.5 U8.6
5V4: C34.1 D5.A J25.VBUS J28.3 U9.5 U10.6
5V5: C42.1 D6.A J31.VBUS J34.3 U11.5 U12.6
!SDN: J3.1 R10.1 U1.1 U2.14
!SDN1: J11.1 R3.1 U3.14 U4.1
!SDN2: J17.1 R15.1 U5.14 U6.1
!SDN3: J23.1 R22.1 U7.14 U8.1
!SDN4: J29.1 R29.1 U9.14 U10.1
!SDN5: J35.1 R36.1 U11.14 U12.1
AC-L: C3.2 J8.RING1 JP10.3
AC-L1: C14.2 J9.RING1 JP17.3
AC-L2: C22.2 J15.RING1 JP27.3
AC-L3: C30.2 J21.RING1 JP37.3
AC-L4: C38.2 J27.RING1 JP47.3
AC-L5: C46.2 J33.RING1 JP57.3
AC-R: C6.2 J8.TIP JP10.2
AC-R1: C15.2 J9.TIP JP17.2
AC-R2: C23.2 J15.TIP JP27.2
AC-R3: C31.2 J21.TIP JP37.2
AC-R4: C39.2 J27.TIP JP47.2
AC-R5: C47.2 J33.TIP JP57.2
ADKEY: R1.1 U2.13
ADKEY1: R7.1 U3.13
ADKEY2: R17.1 U5.13
ADKEY3: R24.1 U7.13
ADKEY4: R31.1 U9.13
ADKEY5: R38.1 U11.13
D+: J6.D+ U2.12
D+1: J5.D+ U3.12
D+2: J13.D+ U5.12
D+3: J19.D+ U7.12
D+4: J25.D+ U9.12
D+5: J31.D+ U11.12
D-: J6.D- U2.11
D-1: J5.D- U3.11
D-2: J13.D- U5.11
D-3: J19.D- U7.11
D-4: J25.D- U9.11
D-5: J31.D- U11.11
GND: C1.2 C4.2 C5.1 C9.2 J1.CD1 J1.GND J2.4 J6.GND J8.EARTH J8.RING2 JP10.1 R2.1 R4.1 U1.7 U1.9 U1.10 U1.11 U1.12 U1.13 U2.3 U2.6
GND1: C2.2 C10.2 C13.1 C16.2 J5.GND J7.CD1 J7.GND J9.EARTH J9.RING2 J10.4 JP17.1 R8.1 R14.1 U3.3 U3.6 U4.7 U4.9 U4.10 U4.11 U4.12 U4.13
GND2: C17.2 C18.2 C21.1 C24.2 J13.GND J14.CD1 J14.GND J15.EARTH J15.RING2 J16.4 JP27.1 R18.1 R21.1 U5.3 U5.6 U6.7 U6.9 U6.10 U6.11 U6.12 U6.13
GND3: C25.2 C26.2 C29.1 C32.2 J19.GND J20.CD1 J20.GND J21.EARTH J21.RING2 J22.4 JP37.1 R25.1 R28.1 U7.3 U7.6 U8.7 U8.9 U8.10 U8.11 U8.12 U8.13
GND4: C33.2 C34.2 C37.1 C40.2 J25.GND J26.CD1 J26.GND J27.EARTH J27.RING2 J28.4 JP47.1 R32.1 R35.1 U9.3 U9.6 U10.7 U10.9 U10.10 U10.11 U10.12 U10.13
GND5: C41.2 C42.2 C45.1 C48.2 J31.GND J32.CD1 J32.GND J33.EARTH J33.RING2 J34.4 JP57.1 R39.1 R42.1 U11.3 U11.6 U12.7 U12.9 U12.10 U12.11 U12.12 U12.13
IN+AMP: R11.2 U1.3
IN+AMP1: R6.2 U4.3
IN+AMP2: R16.2 U6.3
IN+AMP3: R23.2 U8.3
IN+AMP4: R30.2 U10.3
IN+AMP5: R37.2 U12.3
IN-AMP: R5.2 R9.2 U1.4
IN-AMP1: R12.2 R13.2 U4.4
IN-AMP2: R19.2 R20.2 U6.4
IN-AMP3: R26.2 R27.2 U8.4
IN-AMP4: R33.2 R34.2 U10.4
IN-AMP5: R40.2 R41.2 U12.4
MP3-RXI: J2.2 U2.15
MP3-RXI1: J10.2 U3.15
MP3-RXI2: J16.2 U5.15
MP3-RXI3: J22.2 U7.15
MP3-RXI4: J28.2 U9.15
MP3-RXI5: J34.2 U11.15
MP3-TXO: J2.1 U2.16
MP3-TXO1: J10.1 U3.16
MP3-TXO2: J16.1 U5.16
MP3-TXO3: J22.1 U7.16
MP3-TXO4: J28.1 U9.16
MP3-TXO5: J34.1 U11.16
N$1: D1.C R2.2
N$2: C13.2 R6.1
N$3: C11.2 R12.1
N$4: C12.2 R13.1
N$5: C8.2 R9.1
N$6: D2.C R14.2
N$7: C21.2 R16.1
N$8: C5.2 R11.1
N$9: C7.2 R5.1
N$10: C19.2 R19.1
N$11: C20.2 R20.1
N$12: D3.C R21.2
N$13: C29.2 R23.1
N$14: C27.2 R26.1
N$15: C28.2 R27.1
N$16: D4.C R28.2
N$17: C37.2 R30.1
N$18: C35.2 R33.1
N$19: C36.2 R34.1
N$20: D5.C R35.2
N$21: C45.2 R37.1
N$22: C43.2 R40.1
N$23: C44.2 R41.1
N$24: D6.C R42.2
OUT+: J4.P2 J4.P4 JP12.1 U1.5
OUT+1: J12.P2 J12.P4 JP18.1 U4.5
OUT+2: J18.P2 J18.P4 JP28.1 U6.5
OUT+3: J24.P2 J24.P4 JP38.1 U8.5
OUT+4: J30.P2 J30.P4 JP48.1 U10.5
OUT+5: J36.P2 J36.P4 JP58.1 U12.5
OUT-: J4.P1 J4.P3 JP12.2 U1.8
OUT-1: J12.P1 J12.P3 JP18.2 U4.8
OUT-2: J18.P1 J18.P3 JP28.2 U6.8
OUT-3: J24.P1 J24.P3 JP38.2 U8.8
OUT-4: J30.P1 J30.P3 JP48.2 U10.8
OUT-5: J36.P1 J36.P3 JP58.2 U12.8
SD_CLK: J1.SCLK R4.2 U2.9
SD_CLK1: J7.SCLK R8.2 U3.9
SD_CLK2: J14.SCLK R18.2 U5.9
SD_CLK3: J20.SCLK R25.2 U7.9
SD_CLK4: J26.SCLK R32.2 U9.9
SD_CLK5: J32.SCLK R39.2 U11.9
SD_CMD: J1.DI U2.10
SD_CMD1: J7.DI U3.10
SD_CMD2: J14.DI U5.10
SD_CMD3: J20.DI U7.10
SD_CMD4: J26.DI U9.10
SD_CMD5: J32.DI U11.10
SD_DAT: J1.DO U2.8
SD_DAT1: J7.DO U3.8
SD_DAT2: J14.DO U5.8
SD_DAT3: J20.DO U7.8
SD_DAT4: J26.DO U9.8
SD_DAT5: J32.DO U11.8
SHLD: J6.SHIELD J6.SHIELD2 J6.SHIELD3 J6.SHIELD4 J6.SHIELD5 J6.SHIELD6 J6.SHIELD7 J6.SHIELD8 J6.SHIELD9 J6.SHIELD10
SHLD1: J5.SHIELD J5.SHIELD2 J5.SHIELD3 J5.SHIELD4 J5.SHIELD5 J5.SHIELD6 J5.SHIELD7 J5.SHIELD8 J5.SHIELD9 J5.SHIELD10
SHLD2: J13.SHIELD J13.SHIELD2 J13.SHIELD3 J13.SHIELD4 J13.SHIELD5 J13.SHIELD6 J13.SHIELD7 J13.SHIELD8 J13.SHIELD9 J13.SHIELD10
SHLD3: J19.SHIELD J19.SHIELD2 J19.SHIELD3 J19.SHIELD4 J19.SHIELD5 J19.SHIELD6 J19.SHIELD7 J19.SHIELD8 J19.SHIELD9 J19.SHIELD10
SHLD4: J25.SHIELD J25.SHIELD2 J25.SHIELD3 J25.SHIELD4 J25.SHIELD5 J25.SHIELD6 J25.SHIELD7 J25.SHIELD8 J25.SHIELD9 J25.SHIELD10
SHLD5: J31.SHIELD J31.SHIELD2 J31.SHIELD3 J31.SHIELD4 J31.SHIELD5 J31.SHIELD6 J31.SHIELD7 J31.SHIELD8 J31.SHIELD9 J31.SHIELD10
VCCIO: C1.1 C9.1 J1.VCC R1.2 R10.2 U2.4
VCCIO1: C2.1 C16.1 J7.VCC R3.2 R7.2 U3.4
VCCIO2: C17.1 C24.1 J14.VCC R15.2 R17.2 U5.4
VCCIO3: C25.1 C32.1 J20.VCC R22.2 R24.2 U7.4
VCCIO4: C33.1 C40.1 J26.VCC R29.2 R31.2 U9.4
VCCIO5: C41.1 C48.1 J32.VCC R36.2 R38.2 U11.4
VOUTL: C3.1 C7.1 U2.1
VOUTL1: C11.1 C14.1 U3.1
VOUTL2: C19.1 C22.1 U5.1
VOUTL3: C27.1 C30.1 U7.1
VOUTL4: C35.1 C38.1 U9.1
VOUTL5: C43.1 C46.1 U11.1
VOUTR: C6.1 C8.1 U2.2
VOUTR1: C12.1 C15.1 U3.2
VOUTR2: C20.1 C23.1 U5.2
VOUTR3: C28.1 C31.1 U7.2
VOUTR4: C36.1 C39.1 U9.2
VOUTR5: C44.1 C47.1 U11.2